# Altium PCB DM0249.PcbDoc (part 2 of 2)
Units mm, origin at the board's own origin, x right, y up, seen from the top; angles counter-clockwise.
Board outline 25 x 23.86 mm, 4 copper layers (Top Copper, Signal Layer 1, Layer 1, Bottom Layer), stack 1.602 mm thick; 50 components, 26 nets, 168 pads, 141 vias.
Unrouted connection lines stored in the file: 117.
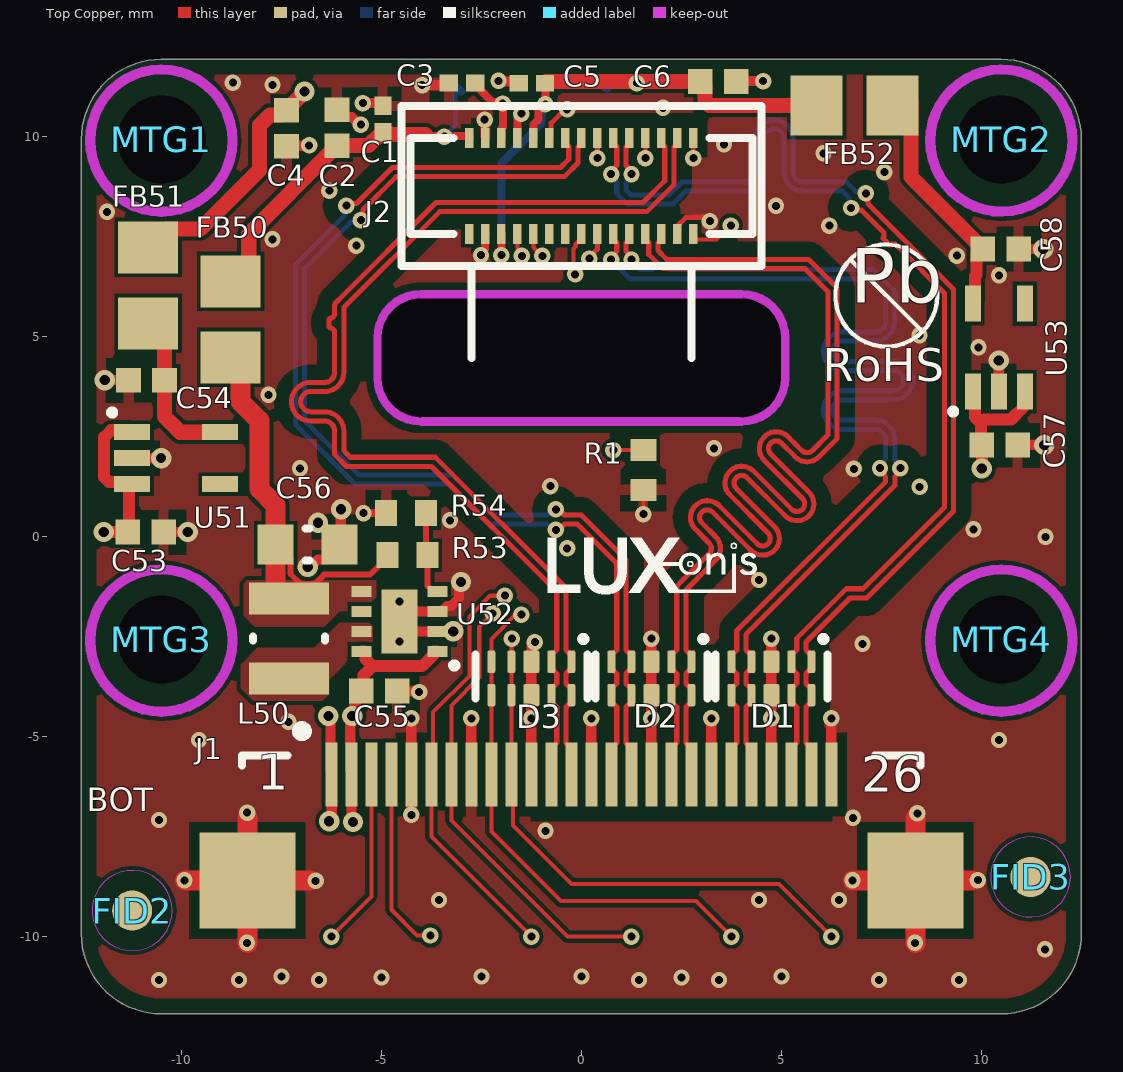
[diagram p0: Top Copper view]

## Via types
v1: diameter 0.41, hole 0.2, Top Copper to Bottom Layer, tented both sides, 101 vias
v2: diameter 0.4, hole 0.2, Top Copper to Bottom Layer, tented both sides, 20 vias
v3: diameter 0.508, hole 0.254, Top Copper to Bottom Layer, tented both sides, 18 vias
v4: diameter 0.406, hole 0.203, Top Copper to Bottom Layer, 2 vias

## Nets (pads, with @x,y where several pads share a name; then routed paths per layer and width w, separated by ;. In a path a pad name is that pad's centre, name@x,y a point inside that pad or via, vN(x,y) a via of type N, cw(c..) or ccw(c..) an arc to the next point about the centre after c; other vN are vias at no path point) (continued)
GND: (continued)
  Top Copper w0.5: v1@-9.912,-8.601 J1.MP1 ; v1@-8.35,-10.163 J1.MP1 ; v1@-8.35,-7.039 J1.MP1 ; v1@-6.788,-8.601 J1.MP1 ; v1@6.788,-8.601 J1.MP2 ; v1@8.35,-10.163 J1.MP2 ; v1@8.35,-7.039 J1.MP2 ; v1@9.759,-8.601 J1.MP2
  other v1: 11.592,-10.321 -8.358,-10.159 8.342,-10.159 -6.639,-8.608 -9.92,-8.597 6.78,-8.597 9.914,-8.59 -0.896,-7.358 6.792,-7.033 -8.354,-6.902 8.401,-6.92 -7.321,-4.633 7.029,-2.683 -0.356,-0.296 11.604,-0.008 9.804,0.179 -3.283,0.404 8.461,1.24 -0.775,1.262 -7.033,1.704 6.815,1.691 3.317,2.204 -7.821,3.542 9.929,4.73 8.454,5.029 10.442,6.529 9.389,7.021 -5.625,7.275 -7.721,7.429 6.2,7.775 -11.858,8.117 4.867,8.267 -6.3,8.65 7.575,9.113 6.054,9.579 3.567,9.804 2.042,10.717 -7.721,11.292 -8.711,11.349
  other v2: -10.555,-11.08 -8.555,-11.08 -6.555,-11.08 1.445,-11.08 3.445,-11.08 7.445,-11.08 9.445,-11.08 -5,-11.025 2.5,-11.025 -7.5,-11 -2.5,-11 0,-11 5,-11 -3.555,-9.08 4.445,-9.08 6.445,-9.08 -10.555,-7.08 -9.555,-5.08 10.445,-5.08 4.445,-1.08
  other v4: -4.55,-2.62 -4.55,-1.62
I2C_SCL: J1.7 J2.20 TP6.1 | length 33.3
  Top Copper w0.102: v1(-2.216,-1.922) -2.216,-1.929 -2.552,-2.265 -2.552,-3.527 -3.25,-4.225 J1.7 -3.25,-7.1 -0.35,-10 v1(1.25,-10) ; J2.20 -1.191,7.561 -1.191,7.229 -0.983,7.02 v1(-0.975,7.02)
  Layer 1 w0.102: v1(-2.216,-1.922) -2.266,-1.872 -2.266,-1.332 -2.057,-1.124 -1.592,-1.124 -1.5,-1.216 -0.262,-1.216 0.25,-0.703 0.25,1.055 -0.606,1.911 -5.085,1.911 -6.138,2.963 -6.138,5.808 -4.796,7.15 -3.371,7.15 -3.017,7.504 -1.467,7.504 -0.983,7.02 v1(-0.975,7.02)
I2C_SDA: J1.6 J2.19 TP5.1 | length 30.8
  Top Copper w0.102: v1(-1.91,-1.48) -2.278,-1.48 -2.798,-2 -2.798,-3.482 -3.706,-4.39 -3.706,-5.707 -3.75,-5.751 J1.6 -3.75,-7.5 v1(-1.25,-10) ; J2.19 -1.6,7.198 -1.486,7.084 v1(-1.486,7.02)
  Layer 1 w0.102: v1(-1.91,-1.48) -1.866,-1.524 -0.285,-1.524 0.471,-0.768 0.471,1.281 -0.36,2.113 -5.001,2.113 -5.89,3.001 -5.89,3.254 -5.89,5.705 -4.73,6.866 -3.369,6.866 -2.949,7.286 -1.772,7.286 -1.506,7.02 v1(-1.486,7.02)
MIPI_C_N: D2.1 D2.10 J1.19 J2.28 | length 27.7
  Top Copper w0.127: J2.28 2,7.43 1.914,7.344 1.914,7.153 2.136,6.932 5.681,6.932 6.397,6.215 6.397,2.645 6.397,2.449 5.941,1.992 cw(c5.644,2.288) 5.347,1.992 5.006,2.333 ccw(c4.87,2.2) 4.736,2.065 5.723,1.078 5.723,1.073 cw(c5.394,0.815) 5.098,0.519 4.144,1.472 ccw(c4.009,1.339) 3.875,1.204 4.862,0.216 4.862,0.212 cw(c4.533,-0.046) 4.236,-0.342 3.283,0.611 ; J1.19@2.75,-5.846 2.75,-5.301 2.614,-5.165 2.614,-4.56 2.614,-4.258 2.689,-4.184 2.713,-4.184 2.75,-4.148 D2.10 2.75,-3.782 2.713,-3.746 2.689,-3.746 2.614,-3.672 2.614,-3.423 2.689,-3.349 2.713,-3.349 2.75,-3.313 D2.1 2.75,-2.947 2.713,-2.911 2.689,-2.911 2.614,-2.837 2.614,-1.334 3.23,-0.718 3.355,-0.593 ccw(c3.06,-0.296) 3.356,0.001 3.014,0.342 cw(c3.148,0.477) 3.283,0.611
MIPI_C_P: D2.2 D2.9 J1.18 J2.27 | length 27.7
  Top Copper w0.127: J2.27 1.6,7.43 1.686,7.344 1.686,7.059 1.974,6.77 2.041,6.703 5.586,6.703 6.169,6.121 6.169,2.873 6.169,2.544 5.779,2.154 cw(c5.644,2.288) 5.509,2.154 5.133,2.529 5.129,2.529 ccw(c4.87,2.2) 4.574,1.904 5.527,0.95 ; J1.18@2.25,-5.751 2.25,-5.301 2.386,-5.165 2.386,-4.466 2.386,-4.258 2.311,-4.184 2.287,-4.184 2.25,-4.148 D2.9 2.25,-3.782 2.287,-3.746 2.311,-3.746 2.386,-3.672 2.386,-3.423 2.311,-3.349 2.287,-3.349 2.25,-3.313 D2.2 2.25,-2.947 2.287,-2.911 2.311,-2.911 2.386,-2.837 2.386,-1.239 2.519,-1.106 3.069,-0.556 3.194,-0.431 ccw(c3.06,-0.296) 3.194,-0.161 ; 3.194,-0.161 2.852,0.181 cw(c3.148,0.477) 3.406,0.807 3.41,0.807 4.397,-0.18 ; 4.398,-0.18 ccw(c4.533,-0.046) 4.667,0.089 ; 4.666,0.089 3.713,1.042 cw(c4.009,1.339) 4.267,1.668 4.272,1.668 5.259,0.681 ; 5.259,0.681 ccw(c5.394,0.815) 5.528,0.95
MIPI_D0_N: D1.1 D1.10 J1.25 J2.5 | length 27.7
  Top Copper w0.127: J2.5 1.2,9.83 1.114,9.744 1.114,9.553 1.114,9.278 1.255,9.138 v1(1.255,9.063) ; J1.25@5.75,-5.846 5.75,-5.301 5.614,-5.165 5.614,-4.56 5.614,-4.258 5.689,-4.184 5.713,-4.184 5.75,-4.148 D1.10 5.75,-3.782 5.713,-3.746 5.689,-3.746 5.614,-3.672 5.614,-3.423 5.689,-3.349 5.713,-3.349 5.75,-3.313 D1.1 5.75,-2.947 5.713,-2.911 5.689,-2.911 5.614,-2.837 5.614,-2.639 6.719,-1.534 7.138,-1.534 9.305,0.633 9.305,6.184 7.163,8.326 7.163,8.529 v1(7.112,8.58)
  Bottom Layer w0.127: v1(1.255,9.063) 1.255,8.987 1.114,8.847 1.114,8.667 1.24,8.541 2.193,8.541 2.519,8.867 3.9,8.867 4.078,8.867 ccw(c4.078,9.121) 4.332,9.121 4.332,9.931 cw(c4.814,9.931) 5.296,9.931 5.296,9.121 ccw(c5.55,9.121) 5.55,8.867 6.55,8.867 6.622,8.867 6.858,8.631 6.981,8.631 7.026,8.586 7.026,8.562 7.093,8.562 v1(7.112,8.58)
MIPI_D0_P: D1.2 D1.9 J1.24 J2.6 | length 27.7
  Top Copper w0.127: v1(0.745,9.063) 0.745,9.138 0.886,9.278 0.886,9.458 0.886,9.744 0.8,9.83 J2.6 ; J1.24@5.25,-5.751 5.25,-5.301 5.386,-5.165 5.386,-4.466 5.386,-4.258 5.311,-4.184 5.286,-4.184 5.25,-4.148 D1.9 5.25,-3.782 5.286,-3.746 5.311,-3.746 5.386,-3.672 5.386,-3.423 5.311,-3.349 5.286,-3.349 5.25,-3.313 D1.2 5.25,-2.947 5.286,-2.911 5.311,-2.911 5.386,-2.837 5.386,-2.544 6.625,-1.305 7.043,-1.305 9.076,0.728 9.076,6.09 7.933,7.233 7.888,7.278 7.887,7.279 ccw(c7.796,7.19) 7.727,7.296 cw(c7.718,7.305) 7.709,7.296 7.547,7.457 cw(c7.556,7.466) 7.547,7.475 ccw(c7.441,7.545) 7.531,7.635 7.325,7.841 7.28,7.886 7.001,8.164 6.798,8.164 v1(6.747,8.215)
  Bottom Layer w0.127: v1(0.745,9.063) 0.745,8.987 0.886,8.847 0.886,8.572 1.146,8.313 2.287,8.313 2.613,8.638 3.9,8.638 4.078,8.638 ccw(c4.078,9.121) 4.56,9.121 4.56,9.931 cw(c4.814,9.931) 5.068,9.931 5.068,9.121 ccw(c5.55,9.121) 5.55,8.638 6.527,8.638 6.55,8.616 6.696,8.47 6.696,8.266 v1(6.747,8.215)
MIPI_D1_N: D1.4 D1.7 J1.22 J2.26 | length 27.6
  Top Copper w0.127: J2.26 1.2,7.43 1.114,7.344 1.114,7.13 1.255,6.989 v1(1.255,6.925) ; J1.22@4.25,-5.846 4.25,-5.301 4.114,-5.165 4.114,-4.56 4.114,-4.258 4.189,-4.184 4.213,-4.184 4.25,-4.148 D1.7 4.25,-3.782 4.213,-3.746 4.189,-3.746 4.114,-3.672 4.114,-3.423 4.189,-3.349 4.213,-3.349 4.25,-3.313 4.25,-2.947 4.213,-2.911 4.189,-2.911 4.114,-2.837 4.114,-2.445 7.838,1.278 7.838,1.497 7.978,1.637 v1(7.978,1.713)
  Bottom Layer w0.127: v1(1.255,6.925) 1.255,6.874 1.457,6.672 1.732,6.672 ccw(c1.732,6.799) 1.856,6.773 cw(c1.882,6.773) 1.882,6.798 2.084,6.798 cw(c2.084,6.773) 2.11,6.773 ccw(c2.234,6.799) 2.234,6.672 2.49,6.672 2.554,6.672 7.301,6.672 7.838,6.136 7.838,5.997 7.838,5.37 cw(c7.355,5.37) 7.355,4.888 6.534,4.888 ccw(c6.534,4.635) 6.534,4.381 7.803,4.381 cw(c7.803,3.899) 7.803,3.417 6.534,3.417 ccw(c6.534,3.163) 6.534,2.91 7.355,2.91 cw(c7.355,2.428) 7.838,2.428 7.838,2.25 7.838,1.928 7.978,1.788 v1(7.978,1.713)
MIPI_D1_P: D1.5 D1.6 J1.21 J2.25 | length 27.6
  Top Copper w0.127: v1(0.745,6.925) 0.745,6.989 0.886,7.13 0.886,7.344 0.8,7.43 J2.25 ; J1.21@3.75,-5.751 3.75,-5.301 3.886,-5.165 3.886,-4.466 3.886,-4.258 3.811,-4.184 3.786,-4.184 3.75,-4.148 D1.6 3.75,-3.782 3.786,-3.746 3.811,-3.746 3.886,-3.672 3.886,-3.423 3.811,-3.349 3.786,-3.349 3.75,-3.313 3.75,-2.947 3.786,-2.911 3.811,-2.911 3.886,-2.837 3.886,-2.35 7.609,1.373 7.609,1.497 7.468,1.637 v1(7.468,1.713)
  Bottom Layer w0.127: v1(0.745,6.925) 0.745,6.914 1.215,6.444 7.206,6.444 7.609,6.041 7.609,5.997 7.609,5.37 cw(c7.355,5.37) 7.355,5.117 6.534,5.117 ccw(c6.534,4.635) 6.534,4.153 7.803,4.153 cw(c7.803,3.899) 7.803,3.646 6.534,3.646 ccw(c6.534,3.163) 6.534,2.681 7.355,2.681 cw(c7.355,2.428) 7.609,2.428 7.609,2.25 7.609,1.928 7.468,1.788 v1(7.468,1.713)
MIPI_D2_N: D2.4 D2.7 J1.16 J2.8 | length 27.6
  Top Copper w0.127: v1@-5.46,7.966 -5.46,8.165 -4.628,8.996 -0.426,8.996 -0.086,9.337 -0.086,9.744 0,9.83 J2.8 ; v1(-0.637,0.678) -0.562,0.678 -0.422,0.537 -0.002,0.537 0.941,-0.405 1.114,-0.579 1.114,-2.837 1.189,-2.911 1.214,-2.911 1.25,-2.947 D2.4 1.25,-3.313 1.214,-3.349 1.189,-3.349 1.114,-3.423 1.114,-3.672 1.189,-3.746 1.214,-3.746 1.25,-3.782 D2.7 1.25,-4.148 1.214,-4.184 1.189,-4.184 1.114,-4.258 1.114,-4.411 1.114,-5.165 1.25,-5.301 J1.16@1.25,-5.846
  Bottom Layer w0.127: v1(-5.513,7.913) -5.566,7.86 -5.765,7.86 -6.918,6.707 -6.918,2.893 -5.566,1.541 -3.208,1.541 -2.204,0.537 -0.855,0.537 -0.714,0.678 v1(-0.637,0.678)
MIPI_D2_P: D2.5 D2.6 J1.15 J2.9 | length 27.6
  Top Copper w0.127: v1(-5.874,8.274) -5.821,8.327 -5.621,8.327 -4.723,9.225 -0.521,9.225 -0.314,9.432 -0.314,9.744 -0.4,9.83 J2.9 ; v1(-0.637,0.168) -0.562,0.168 -0.422,0.309 -0.096,0.309 0.886,-0.673 0.886,-2.837 0.811,-2.911 0.786,-2.911 0.75,-2.947 D2.5 0.75,-3.313 0.786,-3.349 0.811,-3.349 0.886,-3.423 0.886,-3.672 0.811,-3.746 0.786,-3.746 0.75,-3.782 D2.6 0.75,-4.148 0.786,-4.184 0.811,-4.184 0.886,-4.258 0.886,-4.505 0.886,-5.165 0.75,-5.301 J1.15@0.75,-5.751
  Bottom Layer w0.127: v1(-5.874,8.274) -5.927,8.22 -5.927,8.021 -7.147,6.802 -7.147,2.798 -5.661,1.312 -3.303,1.312 -2.299,0.309 -0.855,0.309 -0.714,0.168 v1(-0.637,0.168)
MIPI_D3_N: D3.1 D3.10 J1.13 J2.2 | length 27.7
  Top Copper w0.127: -5.937,4.926 -5.937,5.021 ; J1.13@-0.25,-5.751 -0.25,-5.301 -0.386,-5.165 -0.386,-4.588 -0.386,-4.411 -0.386,-4.258 -0.311,-4.184 -0.287,-4.184 -0.25,-4.148 D3.10 -0.25,-3.782 -0.287,-3.746 -0.311,-3.746 -0.386,-3.672 -0.386,-3.423 -0.311,-3.349 -0.287,-3.349 -0.25,-3.313 D3.1 -0.25,-2.947 -0.287,-2.911 -0.311,-2.911 -0.386,-2.837 -0.386,-1.281 -3.65,1.983 -5.778,1.983 -5.872,2.077 -5.937,2.142 -5.937,2.636 ccw(c-6.42,2.636) -6.42,3.118 -6.763,3.118 cw(c-6.763,3.372) -6.763,3.625 -6.42,3.625 ccw(c-6.42,4.107) -5.937,4.107 -5.937,5.021 ; J2.2 2.4,9.83 2.314,9.744 2.314,8.798 1.637,8.121 -3.541,8.121 -5.937,5.725 -5.937,5.021
MIPI_D3_P: D3.2 D3.9 J1.12 J2.3 | length 27.7
  Top Copper w0.127: J1.12@-0.75,-5.846 -0.75,-5.301 -0.614,-5.165 -0.614,-4.683 -0.614,-4.505 -0.614,-4.258 -0.689,-4.184 -0.714,-4.184 -0.75,-4.148 D3.9 -0.75,-3.782 -0.714,-3.746 -0.689,-3.746 -0.614,-3.672 -0.614,-3.423 -0.689,-3.349 -0.714,-3.349 -0.75,-3.313 D3.2 -0.75,-2.947 -0.714,-2.911 -0.689,-2.911 -0.614,-2.837 -0.614,-1.376 -3.744,1.754 -5.872,1.754 -6.166,2.048 -6.166,2.077 -6.166,2.636 ccw(c-6.42,2.636) -6.42,2.89 -6.763,2.89 cw(c-6.763,3.372) -6.763,3.854 -6.42,3.854 ccw(c-6.42,4.107) -6.166,4.107 -6.166,5.021 -6.166,5.093 ccw(c-6.293,5.093) -6.246,5.211 cw(c-6.246,5.275) -6.309,5.275 -6.309,5.401 cw(c-6.246,5.401) -6.246,5.465 ccw(c-6.293,5.583) -6.166,5.584 -6.166,5.777 cw(c-6.039,5.777) -6.156,5.827 -6.153,5.832 -6.09,5.896 -3.636,8.35 1.543,8.35 2.086,8.893 2.086,9.744 J2.3@2,9.83
NetL50_1: L50.1 U52.7
NetR53_1: R53.1 R54.2 U52.4 | length 2.4
  Top Copper w0.15: R54.2 -3.877,-0.312 R53.1@-3.784,-0.404 ; R53.1 -3.846,-1.234 -3.71,-1.37 U52.4 ; R54.2@-3.813,0.799 -3.716,0.799 -3.716,0.604 R54.2@-3.677,0.565
STROBE3: J1.3 TP1.1 | length 4.7
  Top Copper w0.102: v1(-6.25,-10) -5.25,-9 J1.3@-5.25,-5.751
V_DCDC: C56.2 FB50.1 L50.2 R53.2 U52.5 | length 10.5
  Top Copper w0.15: C56.2 -7.27,-0.57 -7.27,-0.937 -7.019,-1.188 -6.663,-1.188 -6.427,-0.952 -5.282,-0.952 -4.846,-0.517 R53.2 ; U52.5@-5.51,-1.36 U52.5
  Top Copper w0.5: FB50.1 -8.521,4.231 -8.521,3.373 -8.046,2.899 -8.046,1.188 -7.64,0.782 C56.2 -7.64,-1.4 -7.49,-1.55 L50.2
pads on no net: FID1.1 FID2.1 FID3.1 FID4.1 J2.16 J2.21 J2.22 MTG1.1 MTG2.1 MTG3.1 MTG4.1 U51.4 U52.6 U53.4

## Polygon pours and split planes (outlines as drawn)
GND on Top Copper "GND_L01_P023" (solid, remove dead copper, pour order 23): -12.5,-9.931 ccw(c-10.5,-9.931) -10.5,-11.931 10.5,-11.931 ccw(c10.5,-9.931) 12.5,-9.931 12.5,9.931 ccw(c10.5,9.931) 10.5,11.931 -10.5,11.931 ccw(c-10.5,9.931) -12.5,9.931
V_DCDC on Top Copper "V_DCDC_L01_P014" (solid, remove dead copper, pour order 14): -5.128,-1.87 -6.04,-1.87 -6.43,-2.26 -8.16,-2.26 -8.44,-1.98 -8.44,-1.09 -5.131,-1.09
NetL50_1 on Top Copper "NETL50_1_L01_P004" (solid, remove dead copper, pour order 4): -6.05,-2.151 -6.68,-2.781 -8.1,-2.781 -8.52,-3.201 -8.52,-3.79 -8.2,-4.11 -6.48,-4.11 -6.3,-3.93 -6.3,-3.581 -5.82,-3.101 -5.82,-2.811 -5.71,-2.701 -5.21,-2.701 -5.21,-2.151
GND on Layer 1 "GND_L03_P025" (solid, remove dead copper, pour order 25): -12.5,-9.931 ccw(c-10.5,-9.931) -10.5,-11.931 10.5,-11.931 ccw(c10.5,-9.931) 12.5,-9.931 12.5,9.931 ccw(c10.5,9.931) 10.5,11.931 -10.5,11.931 ccw(c-10.5,9.931) -12.5,9.931
3V3 on Layer 1 "3V3_L03_P022" (solid, remove dead copper, pour order 22): -11.688,1.088 -12.3,0.475 -12.287,0.462 -12.287,-0.913 -5.35,-7.85 6.25,-7.85 12.137,-1.963 12.137,2.3 11.35,3.087 9.537,3.087 9.212,2.762 9.213,0.95 3.114,-5.148 -2.965,-5.148 -9.2,1.087
GND on Signal Layer 1 "GND_L02_P024" (solid, remove dead copper, pour order 24): -12.5,-9.931 ccw(c-10.5,-9.931) -10.5,-11.931 10.5,-11.931 ccw(c10.5,-9.931) 12.5,-9.931 12.5,9.931 ccw(c10.5,9.931) 10.5,11.931 -10.5,11.931 ccw(c-10.5,9.931) -12.5,9.931
GND on Bottom Layer "GND_L04_P026" (solid, remove dead copper, pour order 26): -12.5,-9.931 ccw(c-10.5,-9.931) -10.5,-11.931 10.5,-11.931 ccw(c10.5,-9.931) 12.5,-9.931 12.5,9.931 ccw(c10.5,9.931) 10.5,11.931 -10.5,11.931 ccw(c-10.5,9.931) -12.5,9.931

## Keep-outs
Keep-Out Layer:
  circle w0.254: c10.5,-2.6 r1.778
  circle w0.254: c-10.5,9.9 r1.778
  circle w0.254: c-10.5,-2.6 r1.778
  lines w0.254: 8.96,9.011 cw(c10.5,9.9) 8.979,8.979

## Silkscreen, mask and mechanical layers (free items; w line width, h text height)
Top Overlay:
  drawing of 9 lines, arcs and shapes, not listed
  text "Pb" at 6.727,5.397 h2.34
  text "RoHS" at 6.038,3.612 h1.4
  text "BOT" at -12.37,-7.068 h1
Bottom Overlay:
  drawing of 8 lines, arcs and shapes, not listed
  text "1V8" at -7.65,8.825 h1.02 r270
  text "2V8" at 0.288,8.825 h1.02 r270
  text "1V05" at -3.662,8.4 h1.02 r270
  text ".revision" at -8.64,-0.125 h1.52 r270
  text ".project_title" at -7.376,-0.125 h1.52 r270
  text "STROBE" at -6.563,-9.45 h1.02 r270
  text "FSIN" at -4.075,-9.45 h1.02 r270
  text "SDA" at -1.55,-9.45 h1.02 r270
  text "SCL" at 0.962,-9.45 h1.02 r270
  text "CLK" at 3.3,-9.45 h1.02 r270
  text "RST" at 5.825,-9.45 h1.02 r270
  text "GND" at -7.813,-10.312 h1.02 r270
  text "GND" at -5.313,-10.312 h1.02 r270
  text "GND" at -2.813,-10.312 h1.02 r270
  text "GND" at -0.313,-10.312 h1.02 r270
  text "GND" at 2.187,-10.312 h1.02 r270
  text "GND" at 4.687,-10.312 h1.02 r270
Board:
  lines w0.05: -12.5,-9.931 ccw(c-10.5,-9.931) -10.5,-11.931 10.5,-11.931 ccw(c10.5,-9.931) 12.5,-9.931 12.5,9.931 ccw(c10.5,9.931) 10.5,11.931 -10.5,11.931 ccw(c-10.5,9.931) -12.5,9.931 -12.5,-9.931

## Text inside footprints (layer, text, board x,y; h text height)
J1: Top Overlay "26" at 7,-6.676 h1.52; Top Overlay "1" at -8.1,-6.626 h1.52